# Altium PCB DM35_Power_C_V1.0.PcbDoc
Units mm, origin at the board's own origin, x right, y up, seen from the top; angles counter-clockwise.
Board outline 20 x 29.6 mm, 2 copper layers (Top Layer, Bottom Layer), stack 1.511 mm thick; 6 components, 6 nets, 31 pads, 96 vias.
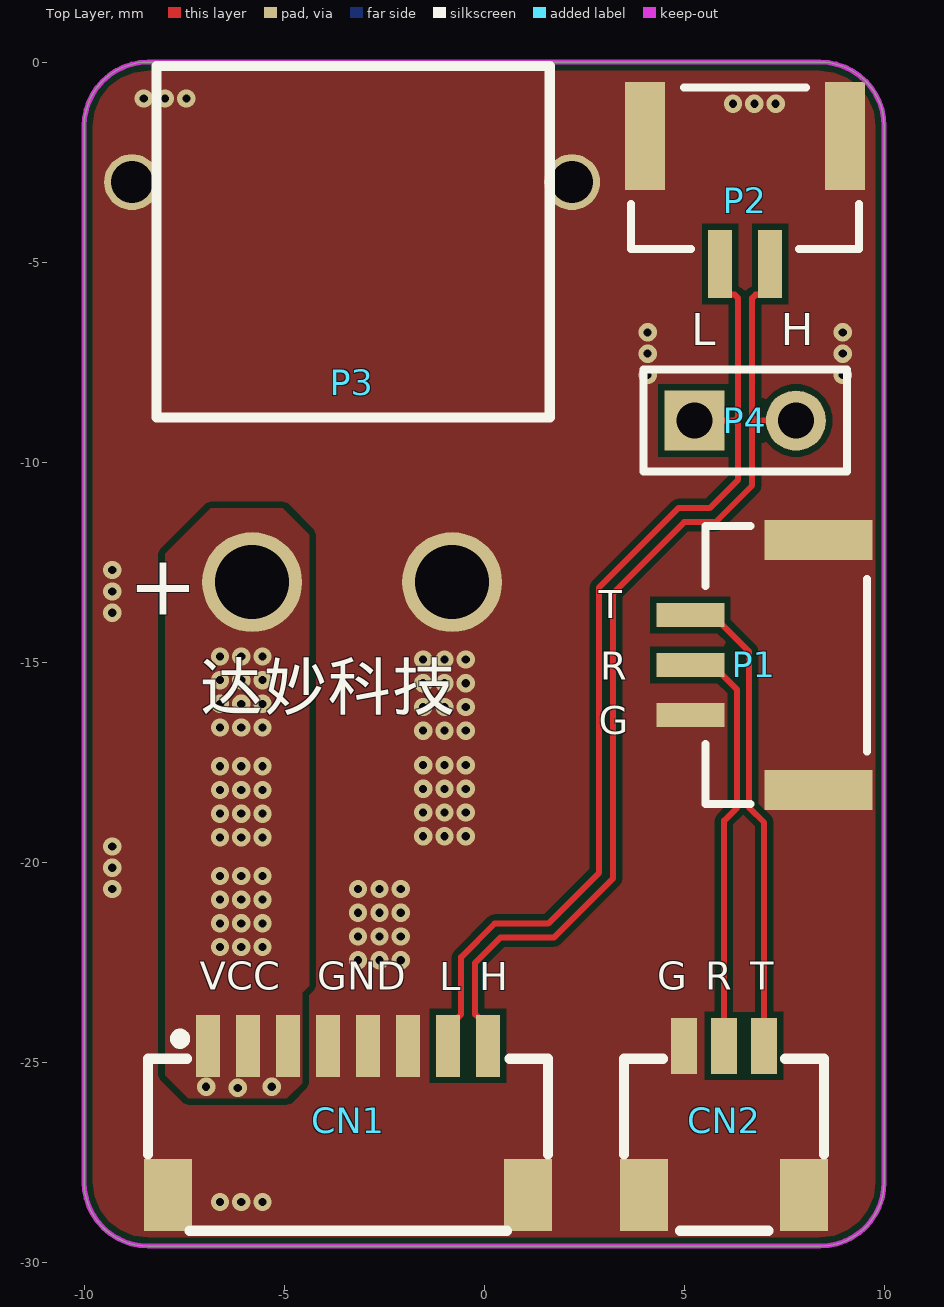
[diagram p0: Top Layer view]
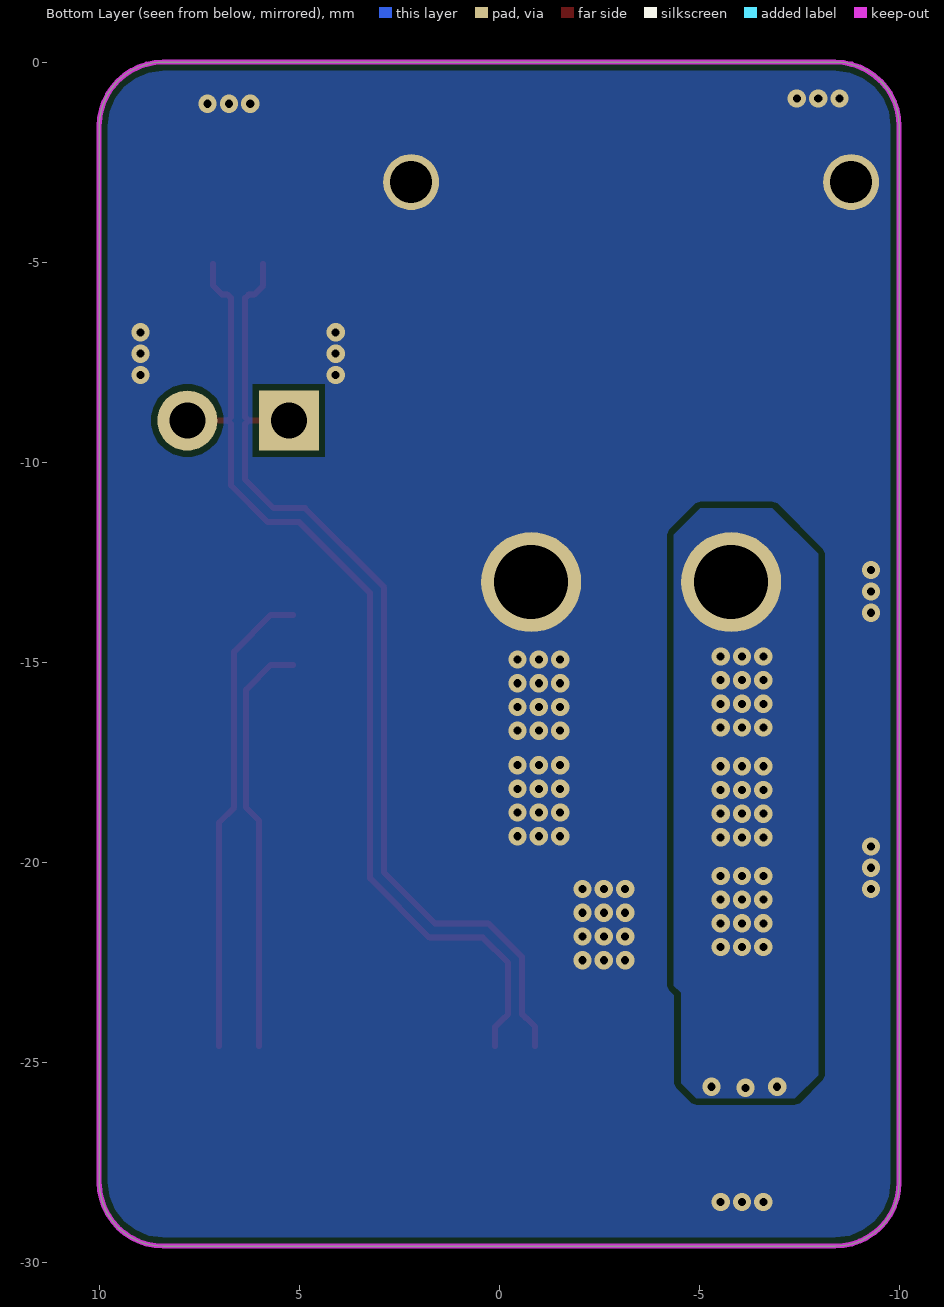
[diagram p1: Bottom Layer view, seen from below]
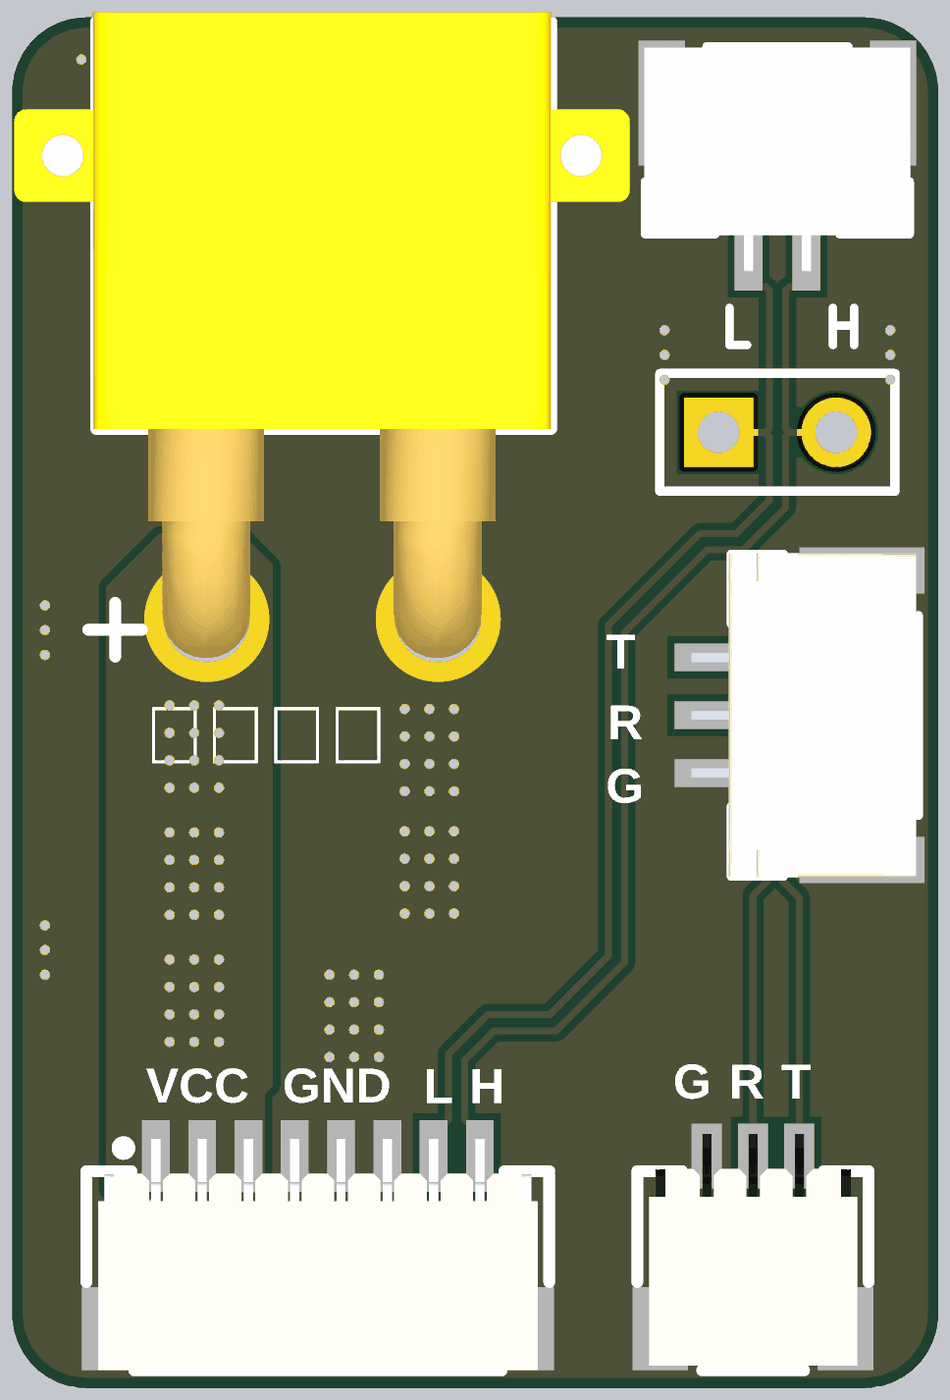
[diagram p2: 3D render of the assembled board from above, using the file's embedded part models]

## Layer stack, top to bottom
Top Solder: solder mask 0.0102, Solder Resist, Dk 3.5
Top Layer: signal copper 0.0356
Dielectric1: core 0.8, FR-4, Dk 4.8
Dielectric2: prepreg 0.32, FR-4, Dk 4.8
Dielectric3: core 0.32, FR-4, Dk 4.8
Bottom Layer: signal copper 0.0356
Bottom Solder: solder mask 0.0102, Solder Resist, Dk 3.5

## Board outline
-8.4,-29.6 cw(c-8.4,-28) -10,-28 -10,-1.6 cw(c-8.4,-1.6) -8.4,0 8.4,0 cw(c8.4,-1.6) 10,-1.6 10,-28 cw(c8.4,-28) 8.4,-29.6

## Design rules (kind name [scope] priority, off if disabled: settings)
Clearance Clearance_1 [InNet('GND') OR InNet('VCC')OR InNet('VCC_24V_Relay')  OR InNet('NetC1_2')       OR InNet('NetD1_1') vs InNet('GND') OR InNet('VCC')OR InNet('VCC_24V_Relay')  OR InNet('NetC1_2')    OR InNet('NetD1_1')] p1: gap=0.305 ignorepadtopadclearanceinfootprint=FALSE
Clearance [InNet('GND') vs InNet('VCC_IN')OR InNet('VCC_12V')OR InNet('VCC_Battery_Charge')OR   InNet('VCC_Hand')OR  InNet('VCC_Auto') OR  InNet('VCC_MOTOR')   OR  InNet('NetU9_5') OR  InNet('VCC_12V_Relay')] p2: gap=0.406 ignorepadtopadclearanceinfootprint=FALSE except(0: Arc-Hole Track-Hole SMDPad-Hole THPad-Hole Via-Hole Fill-Hole Poly-Hole Region-Hole Text-Hole)
Clearance BAT [InNet('BAT-')] p3: gap=0.305 ignorepadtopadclearanceinfootprint=FALSE except(0: Arc-Hole Track-Hole SMDPad-Hole THPad-Hole Via-Hole Fill-Hole Poly-Hole Region-Hole Text-Hole)
Clearance NET_C32 [InNet('NetC23_2')] p4: gap=0.152 ignorepadtopadclearanceinfootprint=FALSE except(0: Arc-Hole Track-Hole SMDPad-Hole THPad-Hole Via-Hole Fill-Hole Poly-Hole Region-Hole Text-Hole)
Clearance ALL [All] p5: gap=0.152 ignorepadtopadclearanceinfootprint=FALSE except(0: Arc-Hole Track-Hole SMDPad-Hole THPad-Hole Via-Hole Fill-Hole Poly-Hole Region-Hole Text-Hole)
ComponentClearance [All] p1: gap=0 collisioncheckmode=3 verticalgap=0 showdistances=FALSE
DiffPairsRouting [All] p1: maxlimit=0.254 minlimit=0.2 mostfreqgap=0.2 toplayer_minwidth=0.15 toplayer_maxwidth=0.381 toplayer_prefwidth=0.15 bottomlayer_minwidth=0.15 bottomlayer_maxwidth=0.381 bottomlayer_prefwidth=0.15 maxuncoupledlength=12.7
Height [All] p1: minheight=0 maxheight=254 prefheight=12.7
PlaneConnect [All] p1: planeconnectstyle=Direct reliefexpansion=0.508 reliefentries=4 reliefconductorwidth=0.254 reliefairgap=0.254
PolygonConnect [All] p1: connectstyle=Direct reliefconductorwidth=0.254 reliefentries=4 polygonreliefangle="90 Angle" airgapwidth=0.254
RoutingVias [All] p1: holewidth=0.711 width=1.27 viastyle="Through Hole" minholewidth=0.203 minwidth=0.457 maxholewidth=0.711 maxwidth=5.08
SolderMaskExpansion [All] p1: expansion=0.102 istentingtop=FALSE
Width [All] p1: maxlimit=2.54 minlimit=0.102 preferedwidth=0.254
26 further rules are at their usual default settings.

## Classes and differential pairs
differential pair NewDifferentialPair1: +CAN_H -CAN_L

## Components (designator, comment, footprint, x,y, rotation, side; value= is the part's Value field where it differs from the comment)
CN1 "A1002WR-S-8P" CONN-SMD_A1002WR-S-8P -3.4,-26.518 r0 top
CN2 "A1002WR-S-3P" CONN-SMD_A1002WR-S-3P 6,-26.455 r0 top
P1 "SM03B-GH" "JST SM03B-GHS-TB" 6.756,-15.071 r270 top
P2 "SM02B-GHS" JST-SM02B-GHS-TB 6.528,-3.175 r0 top
P3 "XT30" XT30PW-M -3.3,-8 r0 top locked
P4 "Header 2" HDR1X2 5.258,-8.961 r0 top

## Footprints (in the part's own frame and the unit in brackets; to place one, negate y for a bottom-side part, rotate by r counter-clockwise, add the part's x,y. Pads: shape width x height; smd on the part's side, far side on the other; paste and mask are expansions set on the pad)
CONN-SMD_A1002WR-S-3P [mm]
  rect 0.4x1.2 smd: 1(-1,1.862)
  rect 0.65x1.4 smd mask+0: 1(-1,1.862) 2(0,1.862) 3(1,1.862)
  rect 1.2x1.8 smd mask+0: 4(1.999,-1.862) 5(-1.999,-1.862)
  silkscreen extent -2.5,-2.76 2.5,1.54, body extent -2.25,-2.66 2.25,2.34, height 2.45
CONN-SMD_A1002WR-S-8P [mm]
  rect 0.6x1.55 smd mask+0: 1(-3.5,1.924) 2(-2.5,1.924) 3(-1.5,1.922) 4(-0.5,1.924) 5(0.5,1.924) 6(1.5,1.924) 7(2.5,1.924) 8(3.5,1.924)
  rect 1.2x1.8 smd mask+0: 9(4.5,-1.8) 10(-4.5,-1.8)
  silkscreen extent -5,-2.7 5,2.23, body extent -4.75,-2.7 4.75,2.3, height 2.45
HDR1X2 [mm] "Connector; Header; 2 Position"
  rect 1.5x1.5 hole 0.9: 1(0,0)
  round 1.5 hole 0.9: 2(2.54,0)
  silkscreen extent -1.27,-1.27 3.81,1.27
"JST SM03B-GHS-TB" [mm] "1.25mm pitch/Disconnectable Crimp style connectors"
  rect 0.6x1.7 smd mask+0: 1(-1.25,-1.6) 2(0,-1.6) 3(1.25,-1.6)
  rect 1x2.7 smd mask+0: 4(-3.125,1.6) 5(3.125,1.6)
  silkscreen extent -3.47,-1.23 3.48,2.82, body extent -3.5,-2.08 3.5,2.77, height 4.4
JST-SM02B-GHS-TB [mm]
  rect 0.6x1.7 smd mask+0: 1(-0.625,-1.875) 2(0.625,-1.875)
  rect 1x2.7 smd mask+0: 3(2.5,1.325) 4(-2.5,1.325)
  silkscreen extent -2.85,-1.5 2.85,2.54, body extent -2.87,-2.33 2.87,2.53, height 4.26
XT30PW-M [mm]
  round 2.5 hole 1.85: 1(-2.5,-5) 2(2.5,-5)
  round 1.4 hole 1.05: 3(-5.5,5) 4(5.5,5)
  silkscreen extent -4.89,-0.89 4.94,7.9, body extent -6.66,-5.84 6.64,8.11, height 5.29

## Part data
CN1: JLCPCB Part Class="Extended Part", LCSC Part Name=8P,脚距1mm, Manufacturer=CJT(长江连接器), Add into BOM=yes, Connector Type=接头, Contact Material=磷青铜, Contact Type=公形引脚, Convert to PCB=yes, Datasheet=https://atta.szlcsc.com/upload/public/pdf/watermark/20190926/C239526_E6EB898D74B3D7AFB647860A542281E4.pdf, Device=A1002WR-S-8P, Manufacturer Part=A1002WR-S-8P, Mounting Type=表面贴装, Name=A1002WR-S-8P, Number of Positions=8, Number of Rows=1, Pitch="0.039\"(1.00mm)", Row Spacing=-, Series=SH, Supplier=LCSC, Supplier Footprint=SMD,P=1mm, Supplier Part=C239526, Symbol=A1002WR-S-8P
CN2: BOM_Manufacturer="Changjiang Connectors", BOM_Manufacturer Part=A1002WR-S-3P, BOM_Supplier=LCSC, BOM_Supplier Part=C239521, Contributor=LCSC, spicePre=C, spiceSymbolName=A1002WR-S-3P
P1: library part "Header 5", "Header, 5-Pin", LatestRevisionDate=17-Jul-2002, LatestRevisionNote="Re-released for DXP Platform.", Publisher="Altium Limited"
P2 P3: library part "Header 4", "Header, 4-Pin", LatestRevisionDate=17-Jul-2002, LatestRevisionNote="Re-released for DXP Platform.", Publisher="Altium Limited"
P4: "Header, 2-Pin", LatestRevisionDate=17-Jul-2002, LatestRevisionNote="Re-released for DXP Platform.", Publisher="Altium Limited"

## Via types
v1: diameter 0.457, hole 0.203, Top Layer to Bottom Layer, tented both sides, 96 vias

## Nets (pads, with @x,y where several pads share a name; then routed paths per layer and width w, separated by ;. In a path a pad name is that pad's centre, name@x,y a point inside that pad or via, vN(x,y) a via of type N, cw(c..) or ccw(c..) an arc to the next point about the centre after c; other vN are vias at no path point)
CAN_H: CN1.8 P2.2 P4.2 | length 25.1
  Top Layer w0.15: CN1.8 0.1,-24.118 -0.125,-23.893 -0.137,-23.893 -0.225,-23.805 -0.225,-22.52 0.406,-21.889 1.745,-21.889 3.226,-20.408 3.226,-13.275 5,-11.501 5.787,-11.501 6.703,-10.584 6.703,-9.67 6.703,-9.049 6.791,-8.961 ; P2.2 7.153,-5.587 6.928,-5.812 6.791,-5.812 6.703,-5.9 6.703,-8.873 6.791,-8.961 ; P4.2 6.791,-8.961
CAN_L: CN1.7 P2.1 P4.1 | length 25.1
  Top Layer w0.15: CN1.7 -0.9,-24.118 -0.675,-23.893 -0.662,-23.893 -0.575,-23.805 -0.575,-22.375 0.261,-21.539 1.6,-21.539 2.876,-20.263 2.876,-13.13 4.855,-11.151 5.642,-11.151 6.353,-10.439 6.353,-9.525 6.353,-9.049 6.265,-8.961 ; P4.1 6.265,-8.961 ; P2.1 5.903,-5.587 6.128,-5.812 6.265,-5.812 6.353,-5.9 6.353,-8.873 6.265,-8.961
GND: CN1.4 CN1.5 CN1.6 CN1.9 CN1.10 CN2.1 CN2.4 CN2.5 P1.3 P1.4 P1.5 P2.3 P2.4 P3.2 P3.3 P3.4
  other v1: -6.604,-28.499 -6.071,-28.499 -5.537,-28.499 -3.15,-22.454 -2.616,-22.454 -2.083,-22.454 -3.15,-21.861 -2.616,-21.861 -2.083,-21.861 -3.15,-21.268 -2.616,-21.268 -2.083,-21.268 -9.296,-20.676 -3.15,-20.676 -2.616,-20.676 -2.083,-20.676 -9.296,-20.142 -9.296,-19.609 -1.524,-19.355 -0.991,-19.355 -0.457,-19.355 -1.524,-18.762 -0.991,-18.762 -0.457,-18.762 -1.524,-18.169 -0.991,-18.169 -0.457,-18.169 -1.524,-17.577 -0.991,-17.577 -0.457,-17.577 -1.524,-16.713 -0.991,-16.713 -0.457,-16.713 -1.524,-16.121 -0.991,-16.121 -0.457,-16.121 -1.524,-15.528 -0.991,-15.528 -0.457,-15.528 -1.524,-14.935 -0.991,-14.935 -0.457,-14.935 -9.296,-13.767 -9.296,-13.233 -9.296,-12.7 4.089,-7.823 8.966,-7.823 4.089,-7.29 8.966,-7.29 4.089,-6.756 8.966,-6.756 6.223,-1.041 6.756,-1.041 7.29,-1.041 -8.509,-0.908 -7.976,-0.908 -7.442,-0.908
USART1_RX: CN2.2 P1.2 | length 10.5
  Top Layer w0.15: P1.2 5.706,-15.071 6.325,-15.689 6.325,-18.638 6,-18.962 CN2.2
USART1_TX: CN2.3 P1.1 | length 11.9
  Top Layer w0.15: P1.1 5.706,-13.821 6.627,-14.741 6.627,-18.638 7,-19.011 CN2.3
VCC24V: CN1.1 CN1.2 CN1.3 P3.1
  other v1: -6.159,-25.644 -6.949,-25.616 -5.309,-25.616 -6.604,-22.124 -6.071,-22.124 -5.537,-22.124 -6.604,-21.532 -6.071,-21.532 -5.537,-21.532 -6.604,-20.939 -6.071,-20.939 -5.537,-20.939 -6.604,-20.346 -6.071,-20.346 -5.537,-20.346 -6.604,-19.381 -6.071,-19.381 -5.537,-19.381 -6.604,-18.788 -6.071,-18.788 -5.537,-18.788 -6.604,-18.196 -6.071,-18.196 -5.537,-18.196 -6.604,-17.603 -6.071,-17.603 -5.537,-17.603 -6.604,-16.638 -6.071,-16.638 -5.537,-16.638 -6.604,-16.045 -6.071,-16.045 -5.537,-16.045 -6.604,-15.452 -6.071,-15.452 -5.537,-15.452 -6.604,-14.86 -6.071,-14.86 -5.537,-14.86

## Polygon pours and split planes (outlines as drawn)
GND on Top Layer "NONET_L01_P-001" (solid, pour order 2): -8.4,-29.6 cw(c-8.4,-28) -10,-28 -10,-1.6 cw(c-8.4,-1.6) -8.4,0 8.4,0 cw(c8.4,-1.6) 10,-1.6 10,-28 cw(c8.4,-28) 8.4,-29.6
VCC24V on Top Layer "NONET_L01_P-001" (solid, pour order 0): -7.976,-12.294 -6.833,-11.151 -5.029,-11.151 -4.369,-11.811 -4.369,-23.089 -4.547,-23.266 -4.547,-25.527 -4.928,-25.908 -7.391,-25.908 -7.976,-25.324
VCC24V on Bottom Layer "NONET_L01_P-001" (solid, pour order 1): -7.976,-12.294 -6.833,-11.151 -5.029,-11.151 -4.369,-11.811 -4.369,-23.089 -4.547,-23.266 -4.547,-25.527 -4.928,-25.908 -7.391,-25.908 -7.976,-25.324
GND on Bottom Layer "NONET_L01_P-001" (solid, pour order 3): -8.4,-29.6 cw(c-8.4,-28) -10,-28 -10,-1.6 cw(c-8.4,-1.6) -8.4,0 8.4,0 cw(c8.4,-1.6) 10,-1.6 10,-28 cw(c8.4,-28) 8.4,-29.6

## Keep-outs
Keep-Out Layer:
  the board outline again, w0.127

## Silkscreen, mask and mechanical layers (free items; w line width, h text height)
Top Overlay:
  text "L" at 5.184,-7.084 h0.8
  text "H" at 7.419,-7.084 h0.8
  text "T" at 2.87,-14.148 h1.2
  text "R" at 2.909,-15.676 h1.2
  text "达妙科技" at -7.112,-16.561 h2
  text "G" at 2.87,-17.046 h1.2
  text "VCC" at -7.112,-23.432 h1.2
  text "GND" at -4.165,-23.432 h1.2
  text "L" at -1.118,-23.446 h1.2
  text "H" at -0.127,-23.446 h1.2
  text "G" at 4.324,-23.432 h1.2
  text "R" at 5.531,-23.432 h1.2
  text "T" at 6.656,-23.432 h1.2
Mechanical 1:
  the board outline again, w0.127

## Text inside footprints (layer, text, board x,y; h text height)
P3: Top Overlay "+" at -8.89,-13.818 h1.52